# Altium PCB Lipo-Charger-PCB.PcbDoc
Units mm, origin at the board's own origin, x right, y up, seen from the top; angles counter-clockwise.
Board outline 55.88 x 55.88 mm, 2 copper layers (Top Layer, Bottom Layer); 21 components, 9 nets, 56 pads, 4 vias.
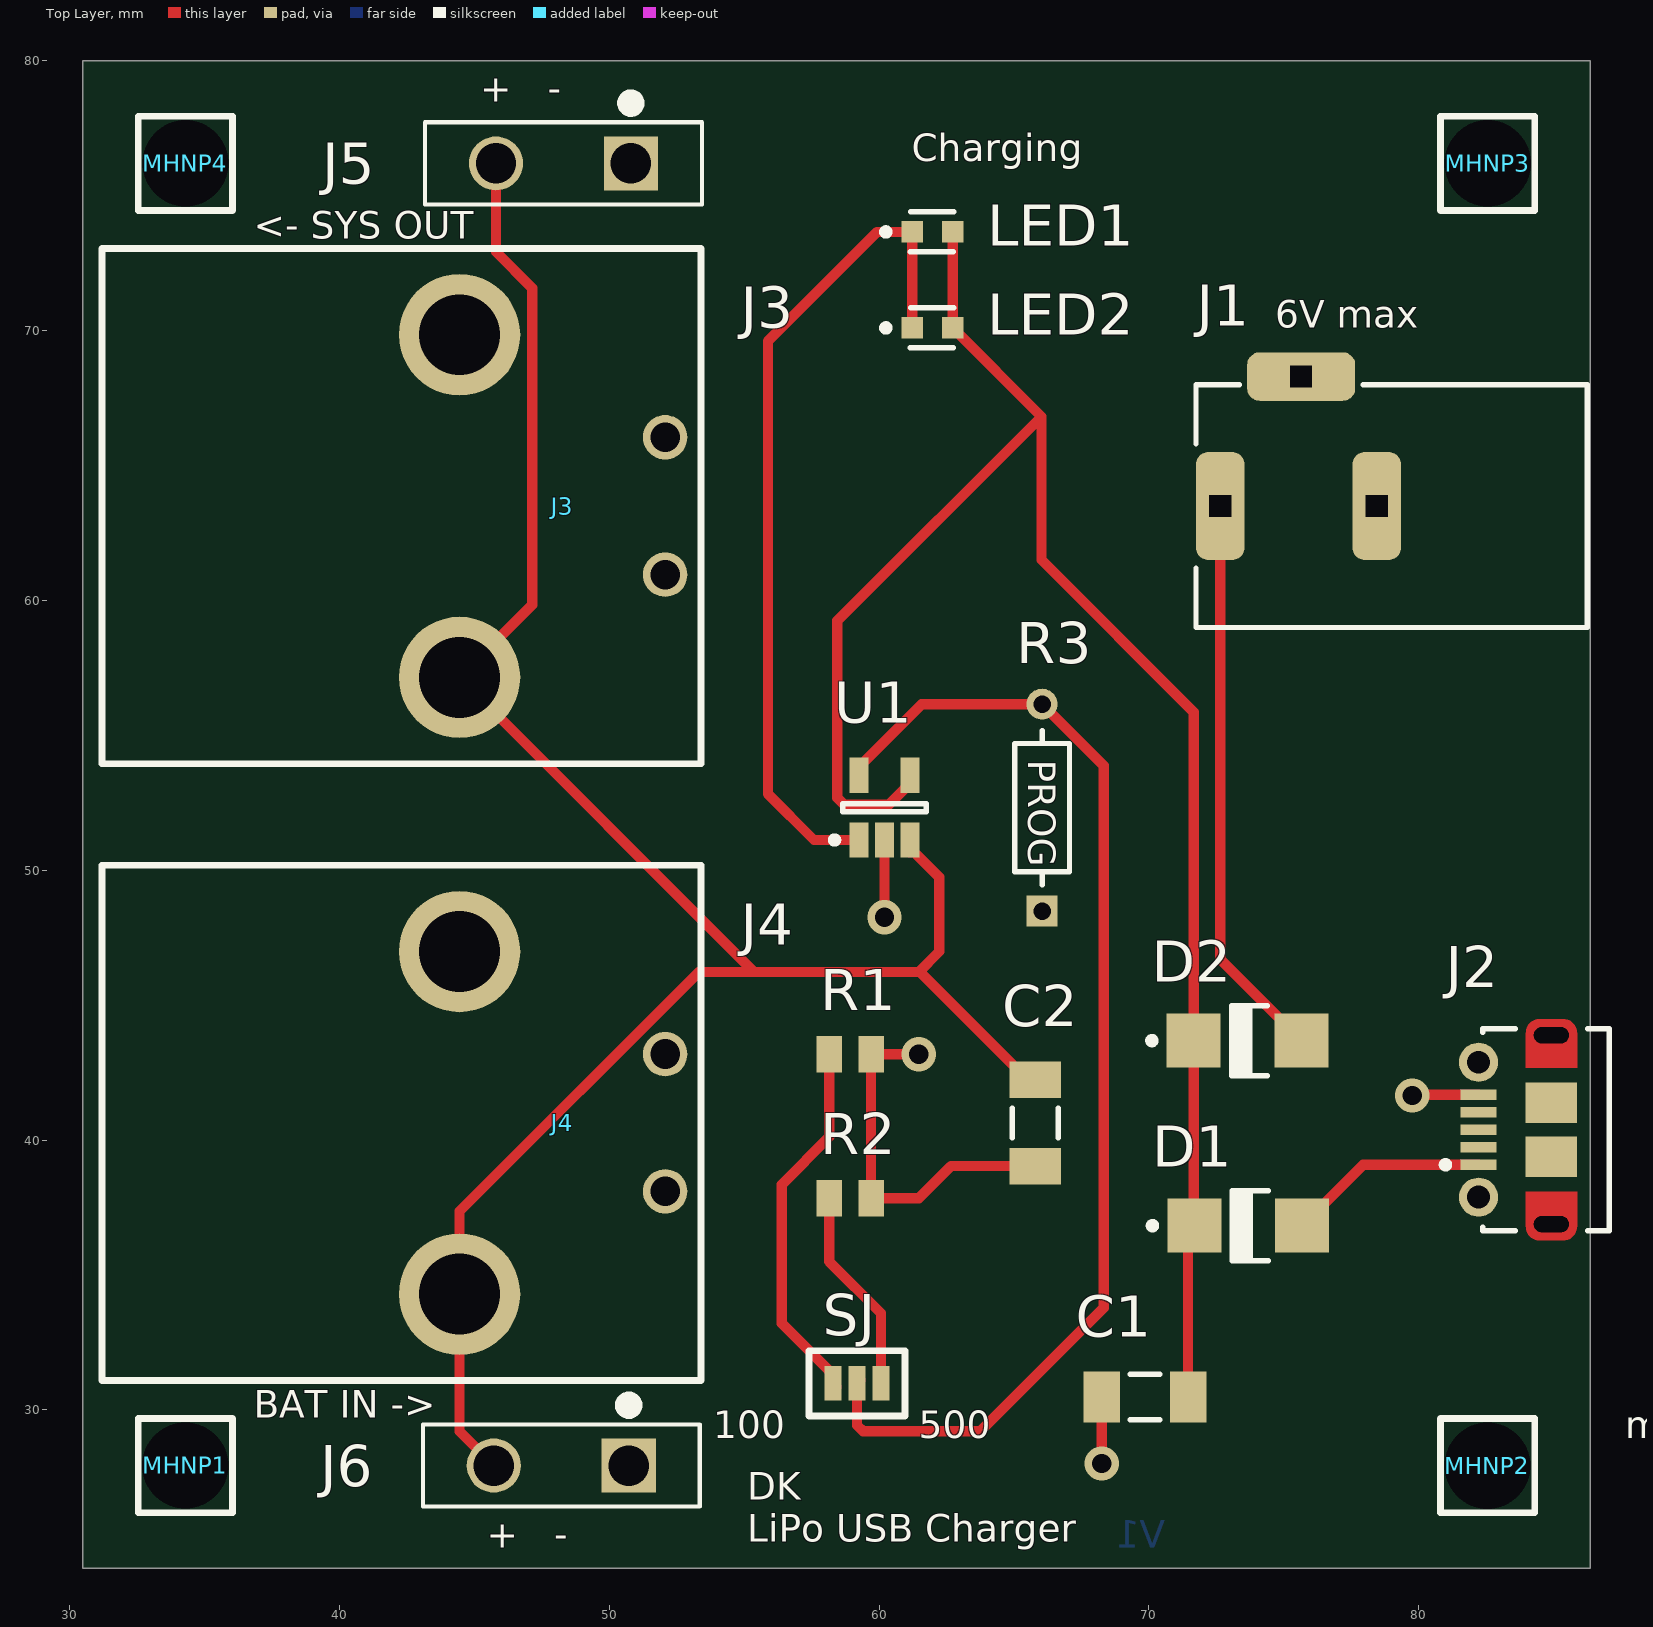
[diagram p0: Top Layer view]
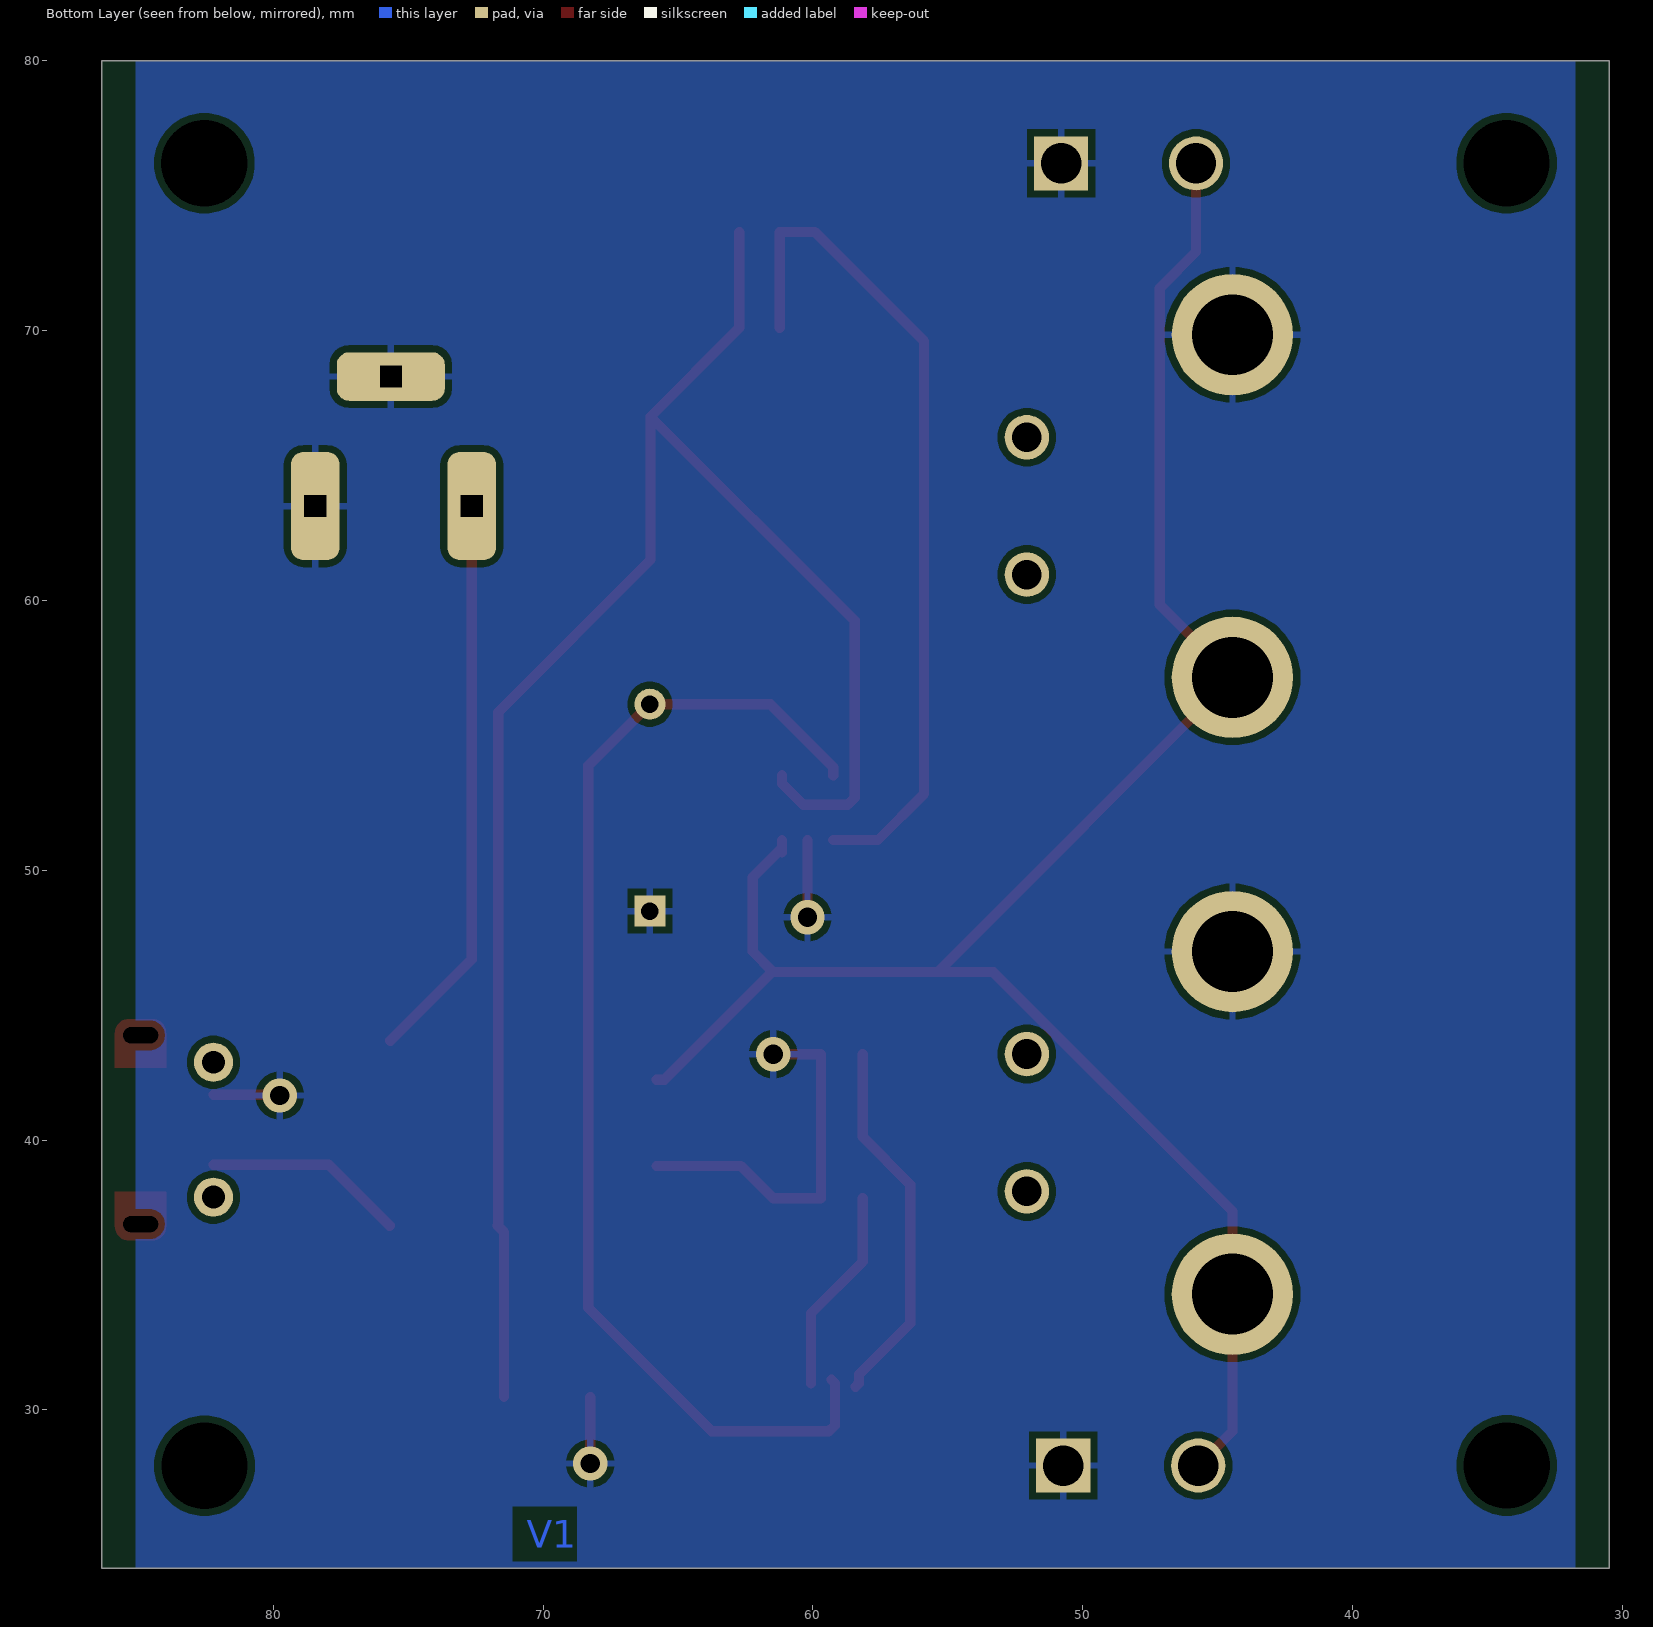
[diagram p1: Bottom Layer view, seen from below]
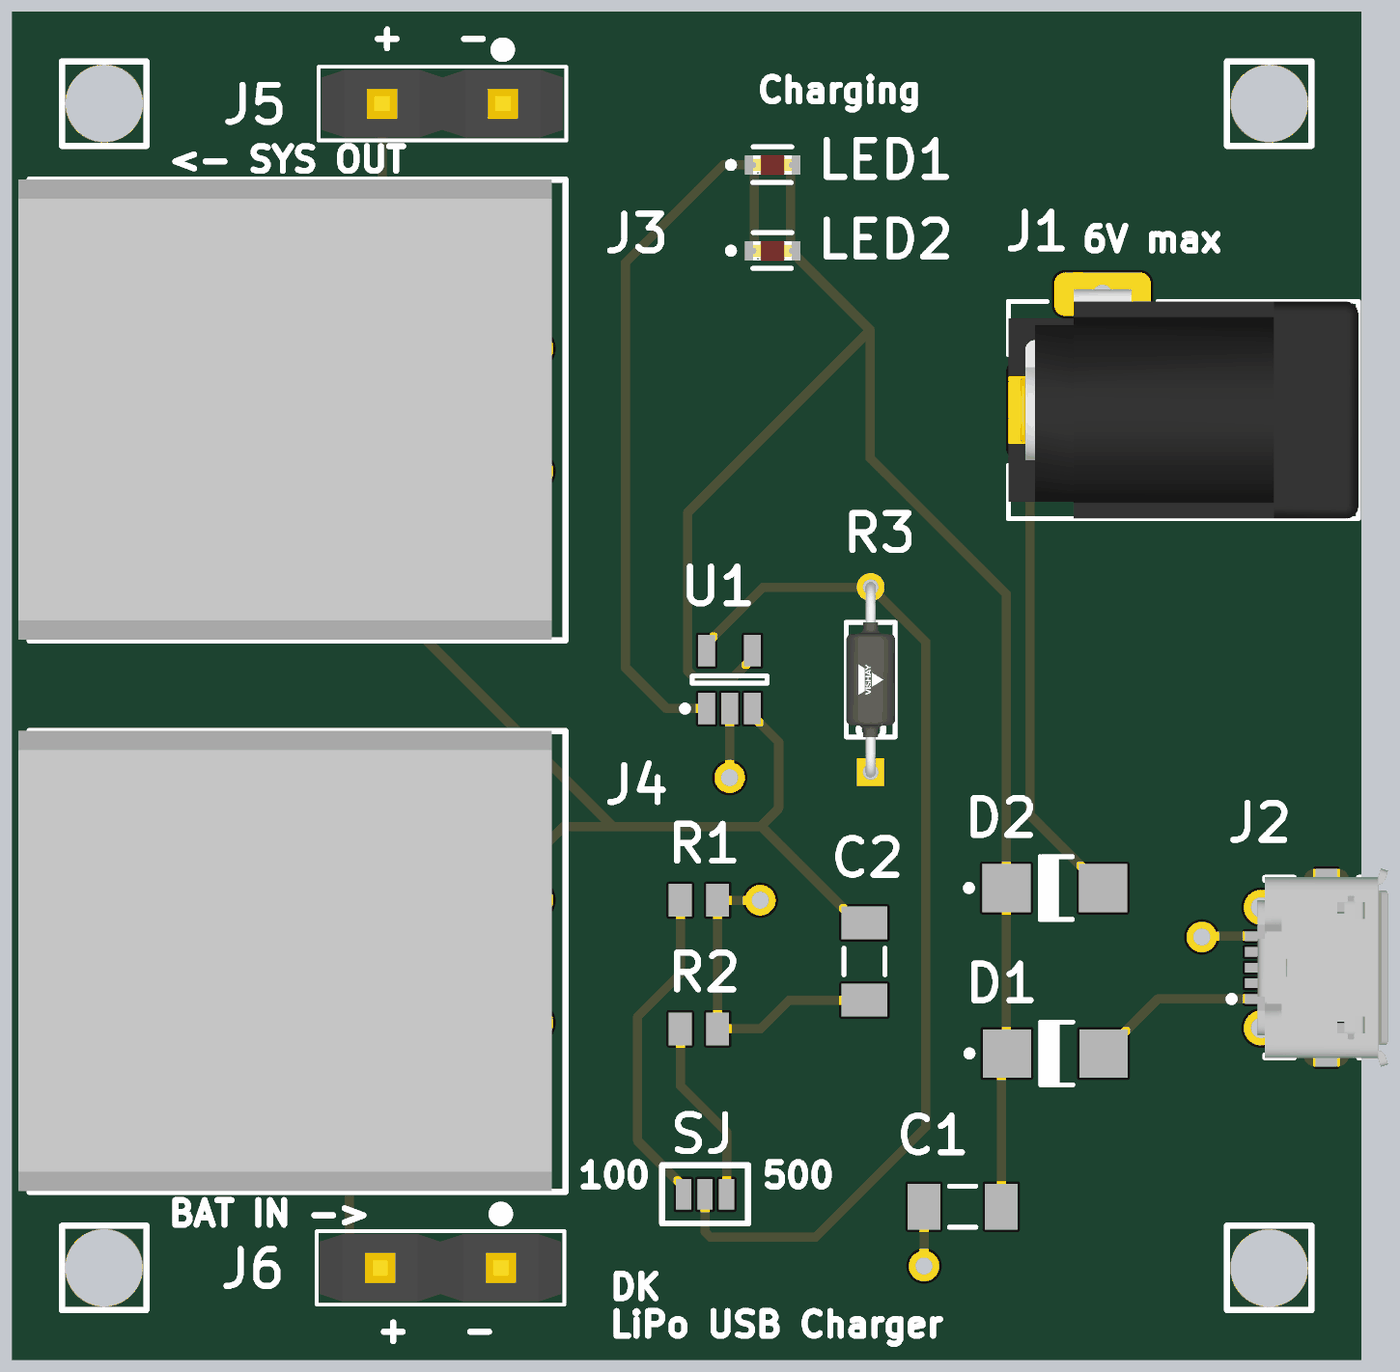
[diagram p2: 3D render of the assembled board from above, using the file's embedded part models]

## Layer stack, top to bottom
Top Solder: solder mask 0.0102, Solder Resist, Dk 3.5
Top Layer: signal copper 0.0356
Dielectric 1: dielectric 0.32, FR-4, Dk 4.8
Bottom Layer: signal copper 0.0356
Bottom Solder: solder mask 0.0102, Solder Resist, Dk 3.5

## Board outline
30.48,24.13 30.48,80.01 86.36,80.01 86.36,24.13

## Design rules (kind name [scope] priority, off if disabled: settings)
Clearance [All] p1: gap=0.254 ignorepadtopadclearanceinfootprint=TRUE
PolygonConnect [All] p1: connectstyle=Relief reliefconductorwidth=0.254 reliefentries=4 polygonreliefangle="90 Angle" airgapwidth=0.254
RoutingVias [All] p1: holewidth=0.711 width=1.27 viastyle="Through Hole" minholewidth=0.711 minwidth=1.27 maxholewidth=0.711 maxwidth=1.27
SolderMaskExpansion [All] p1: expansion=0.102 istentingtop=FALSE
SupplyNets "Schematic Supply Nets" [InNet('GND')] p1: voltage=0.000
Width [All] p1: maxlimit=1.016 minlimit=0.254 preferedwidth=1.016 minimp=50.000000 maximp=50.000000 favimp=50.000000
30 further rules are at their usual default settings.

## Components (designator, comment, footprint, x,y, rotation, side; value= is the part's Value field where it differs from the comment)
C1 "4.7uF" CAPC1206(3216)150_M 69.85,30.48 r0 top
C2 "4.7uF" CAPC1206(3216)150_M 65.786,40.64 r90 top
D1 "40V, 1A" ONSC-SMA-2-403D-02_V 73.681,36.83 r0 top
D2 "40V, 1A" ONSC-SMA-2-403D-02_V 73.66,43.688 r0 top
J1 "694106301002" 694106301002 78.994,63.5 r90 top
J2 "Micro-USB B" USB-MICRO-B_V 83.566,40.386 r90 top locked
J3 "connector header" 2-179276-2 44.45,69.85 r270 top
J4 "connector header" 2-179276-2 44.45,46.99 r270 top
J5 "1933189" CONN02_1933189_PXC 50.8,76.2 r180 top
J6 "1933189" CONN02_1933189_PXC 50.72,27.94 r180 top
LED1 "RED" FP-SML-LX0603IW-TR-MFG 61.976,73.66 r0 top
LED2 "RED" FP-SML-LX0603IW-TR-MFG 61.976,70.104 r0 top
MHNP1 "Mounting Hole Non-Plated 3.2mm" MTHNP3P2 34.29,27.94 r180 top locked
MHNP2 "Mounting Hole Non-Plated 3.2mm" MTHNP3P2 82.55,27.94 r270 top locked
MHNP3 "Mounting Hole Non-Plated 3.2mm" MTHNP3P2 82.55,76.2 r90 top locked
MHNP4 "Mounting Hole Non-Plated 3.2mm" MTHNP3P2 34.29,76.2 r90 top locked
R1 "2K ohm" RESC2013X70X40LL20T20 58.928,43.18 r180 top
R2 "2K ohm" RESC2013X70X40LL20T20 58.928,37.846 r180 top
R3 "PROG" FP-CMF50-0 66.04,52.324 r90 top
SJ "SJUMPER" SJUMPER-Footprint-1 59.182,30.988 r0 top
U1 "Charge Management Controller" SOT-23-OT5_M 60.198,52.324 r90 top

## Footprints (in the part's own frame and the unit in brackets; to place one, negate y for a bottom-side part, rotate by r counter-clockwise, add the part's x,y. Pads: shape width x height; smd on the part's side, far side on the other; paste and mask are expansions set on the pad)
2-179276-2 [mm] "2_hole_x19mmy22mm"
  round 4.5 hole 3: 1(0,0) 2(12.7,0)
  round 1.65 hole 1.1: ""(3.8,7.62) ""(8.89,7.62)
  silkscreen extent -3.2,-13.25 15.9,8.95, body extent -3.22,-13.73 15.87,8.37, height 10.86
694106301002 [mm] "DC Power Jack Right Angled(6.4)"
  rrect50% 4x1.8 hole 0.8 square: 1(0,6.35) 2(0,0.55)
  rrect50% 1.8x4 hole 0.8 square: 3(4.8,3.35)
  silkscreen extent -4.5,-7.25 4.5,7.25, body extent -4.5,-7.25 5,7.25, height 10.75
CAPC1206(3216)150_M [mm] "Chip Capacitor, Body 3.2x1.6mm, Height 1.5mm, IPC Low Density"
  rect 1.35x1.9 smd: 1(-1.6,0) 2(1.6,0)
  silkscreen extent -0.55,-0.85 0.55,0.85, body extent -1.7,-0.9 1.7,0.9, height 1.5
CONN02_1933189_PXC [mil]
  rect 79x79 / inner round 60 / far side rect 79x79 hole 59 paste-99999 mask+0: 1(0,0)
  round 79 / inner round 60 / far side round 79 hole 59 paste-99999 mask+0: 2(196.85,0)
  silkscreen extent -104,-98 300,60, body extent -98,-55 295,55, height 374
FP-CMF50-0 [mm]
  rect 1.15x1.15 hole 0.65 paste-2539.97 mask+0: 1(-3.835,0)
  round 1.15 hole 0.65 paste-2539.97 mask+0: 2(3.835,0)
  silkscreen extent -2.86,-1.01 2.86,1.01, body extent -4.51,-1.11 4.51,1.11, height 0.25
FP-SML-LX0603IW-TR-MFG [mm]
  rect 0.8x0.8 smd paste+0 mask+0: 1(-0.75,0) 2(0.75,0)
  silkscreen extent -1.85,-0.73 0.8,0.75, body extent -1.25,-0.63 1.25,0.63, height 0.25
MTHNP3P2 [mm]
  round 1 hole 3.2: ""(0.009,-0.002)
  silkscreen extent -1.75,-1.75 1.75,1.75
ONSC-SMA-2-403D-02_V [mm] "Molded, 2-Leads, Body 4.57x2.92mm"
  rect 2x2 smd: 1(-2,0) 2(2,0)
  silkscreen extent -3.67,-1.3 0.74,1.3, body extent -2.16,-1.3 2.16,1.3, height 2.2
RESC2013X70X40LL20T20 [mm] "Chip Resistor, 2-Leads, Body 2.00x1.25mm, IPC High Density"
  rect 0.95x1.35 smd: 1(-0.775,0) 2(0.775,0)
  body extent -1.1,-0.72 1.1,0.72, height 0.7
SJUMPER-Footprint-1 [mil]
  rect 25x50 smd: 1(-35,0) 2(0,0) 3(35,0)
  silkscreen extent -70,-48 70,48
SOT-23-OT5_M [mm] "SOT23, 5-Leads, Body 2.9x1.7mm, Pitch 0.95mm, Lead Span 2.8mm, IPC Low Density"
  rect 1.3x0.7 smd: 1(-1.2,0.95) 2(-1.2,0) 3(-1.2,-0.95) 4(1.2,-0.95) 5(1.2,0.95)
  silkscreen extent -1.32,-1.55 0.15,1.97, body extent -0.9,-1.55 0.9,1.55, height 1.45
USB-MICRO-B_V [mm] "USB, MICRO B, Body 7.491x4.695 mm, Pitch 0.65 mm"
  rect 0.4x1.35 smd: 1(-1.3,1.35) 2(-0.65,1.35) 3(0,1.35) 4(0.65,1.35) 5(1.3,1.35)
  round 1.45 hole 0.85: 6(-2.5,1.35) 7(2.5,1.35)
  rrect50% 0x0 hole 0.6 slot 1.3 at 90 deg: 8(-3.5,-1.35) 11(3.5,-1.35)
  rect 1.5x1.9 smd: 9(-1,-1.35) 10(1,-1.35)
  Top Layer circle w0.5: c-3.6,-1.8 r0.25
  Top Layer circle w0.5: c-3.6,-0.9 r0.25
  Top Layer circle w0.5: c3.6,-1.8 r0.25
  Top Layer circle w0.5: c3.6,-0.9 r0.25
  Top Layer region: -3.6,-1.8 -3.6,-0.9 -4.1,-0.9 -4.1,-1.8
  Top Layer region: 3.6,-0.9 3.6,-1.8 4.1,-1.8 4.1,-0.9
  Top Layer region: 2.3,-0.4 2.3,-2.3 3.6,-2.3 3.6,-0.4
  Top Layer region: -2.3,-2.3 -2.3,-0.4 -3.6,-0.4 -3.6,-2.3
  silkscreen extent -3.75,-3.5 3.75,2.7, body extent -4.1,-3.9 4.1,1.5, height 2.67

## Part data
C1 C2: library part CMP-1037-04894-1, Case-EIA=1206, Case-Metric=3216, Rated Voltage="6.3 V", Tolerance=Â±5%, Max Thickness="1.45 mm", Technology=SMT
D1 D2: library part CMP-1055-00320-1, "Schottky Power Rectifier, 2-Pin SMA, Pb-Free, Tape and Reel", Manufacturer="On Semiconductor", PartNumber=MBRA140T3G, ComponentLink1Description="Manufacturer URL", ComponentLink1URL=http://www.onsemi.com/, ComponentLink2Description=Datasheet, ComponentLink2URL=http://www.onsemi.cn/pub_link/Collateral/MBRA140T3-D.PDF, ComponentLink3Description="Package Specification", ComponentLink3URL=http://www.onsemi.com/pub_link/Collateral/403D-02.PDF, Configuration=Single, DatasheetVersion="Rev. 10", IFSM Max (A)=30, Mounting Technology="Surface Mount", PackageDescription="2-Pin Small Molded Package, J-Bend Lead, Body 2.605 x 4.315 mm", PackageReference=SMA-2-403D-02, PackageVersion="Rev. G, 07/2012", Packing="Tape and Reel", RoHS=TRUE
J1: library part CMP-1502-00188-2, Color=Black, Current Rating=5A, Flammability Rating="UL94 V-0", Insulation Resistance=100MΩ, Max Operating Temperature=85°C, Min Operating Temperature=-40°C, Operating Supply Voltage=24V, Voltage Rating (DC)=20V, Connector Type=Power, Contact Gender=Female, Contact Material="Gold, Tin", Contact Plating=Tin, Gender=Male, Height=11mm, Housing Material=Polyamide, Mount="Through Hole", NexarPartId=52676100, Number of Contacts=3, Packaging=Bulk, REACH SVHC=Unknown, RoHS=Compliant, Shielding=Unshielded, Termination="Through Hole", Voltage Rating=24V
J2: library part CMP-2000-05827-1, Manufacturer=Molex, Package Description="5-Leads USB, Micro B, Body 7.5 x 5 mm, Pitch 0.65 mm", Package Reference=MICRO-B, Package Version="Rev. F, 12/2012", Standard Package=1, Voltage - Max=30V, 3D Model=105017-0001.stp, Catalog Drawings=1050170001, Category=Connectors,Interconnects, Circuits=5, Connector Type=USB-microB, Datasheet URL=http://www.molex.com/elqNow/elqRedir.htm?ref=http://www.molex.com/webdocs/datasheets/pdf/en-us/1050170001_IO_CONNECTORS.pdf, Datasheet Version=03/2016, Family=USB,DVI,HDMIConnectors, Featured Product=Micro-USBConnectorsUSBConnectors, Features=Shielded,SolderRetention, Gender=Receptacle, Ingress Protection=-, Manufacturer URL=http://www.molex.com/, Mating Products=WM17145-ND-CABLEMICROUSBBTOSTDA1.0MWM17147-ND-CABLEMICROUSBBTOSTDA2.0MWM17146-ND-CABLEMICROUSBBTOSTDA1.5M, Mounting Technology=SurfaceMount, Mounting Type=BoardCutout,SurfaceMount,RightAngle, Number of Contacts=5, Online Catalog=Molex-MicroUSB, Other Names=WM1399DKR, Package URL=http://www.molex.com/pdm_docs/sd/1050170001_sd.pdf, Packaging=Digi-Reel®, PCN Assembly/Origin=ResinSupplier21/Oct/2015, RoHS Information=1050170001CertofCompliance, Series=-, Specifications=-
J3 J4: library part 2-179276-2, Manufacture=TE, Supplier Part Number 1=A29548-ND, Manufacture part number=2-179276-2, Supplier 1=Digikey
J5 J6: "No Description Available", Mfr_Name="Phoenix Contact", ComponentLink1Description="New link", ComponentLink1URL=https://www.digikey.de/en/products/detail/phoenix-contact/1933189/568682, RefDes=RefDes, Type=Type
LED1 LED2: library part CMP-57192-000012-1, "LED RED DIFFUSED SMD", Case Code (Imperial)=0603, Case Code (Metric)=1608, Color=Red, Forward Current=20mA, Forward Voltage=2V, Lens Color=White, Max Operating Temperature=85°C, Min Operating Temperature=-25°C, Package Quantity=1, Power Dissipation=50mW, Approvals=UL, Case/Package=0603, Diameter=0.061inch, Dominant Wavelength=635nm, Height=0.6mm, Illumination Color=Red, Lead Free="Lead Free", Length=1.6mm, Lens Style=Diffused, Lens Transparency=Diffused, Luminous Intensity=14mcd, Mount="Surface Mount", Number of LEDs=1, Number of Pins=2, Packaging="Tape and Reel", RoHS Compliant=Yes, Test Current=20mA, Viewing Angle=160°, Wavelength=635nm, Width=0.8mm
MHNP1 MHNP2 MHNP3 MHNP4: library part MTHNP3P2
R1 R2: library part CMP-2001-00483-1, Manufacturer=Panasonic, Part Number=ERJ-P06J202V
R3: library part CMP-00030-44386654-1, Case/Package=Axial, Max Operating Temperature=175°C, Max Power Dissipation=250mW, Min Operating Temperature=-55°C, Power Rating=125mW, Resistance=73.2kΩ, Temperature Coefficient=50ppm/°C, Tolerance=1%, Voltage Rating=200V, Composition="Metal Film", Diameter=1.65mm, Features="Flame Retardant Coating, Moisture Resistant", Lead Free="Lead Free", Length=3.81mm, Mount="Through Hole", NexarPartId=44386654, Number of Terminations=2, Packaging="Cut Tape", RoHS=Compliant, Schedule B="8533210090, 8533210090", Termination=Axial, Voltage Rating (DC)=200V, Width=1.65mm
SJ: library part CMP-00000-1, "solder jumper 3 pods and pins", Pins=3
U1: library part CMP-0133-00139-1, Code_IPC=SOT23-5, DatasheetVersion="revB, Sep-2007", PackageDescription="5-Lead Plastic Small Outline Transistor (OT) [SOT-23]", PackageReference=SOT-23-OT5, PackageVersion="revBB, Aug-2009"

## Via types
v1: diameter 1.27, hole 0.711, Top Layer to Bottom Layer, 4 vias

## Nets (pads, with @x,y where several pads share a name; then routed paths per layer and width w, separated by ;. In a path a pad name is that pad's centre, name@x,y a point inside that pad or via, vN(x,y) a via of type N, cw(c..) or ccw(c..) an arc to the next point about the centre after c; other vN are vias at no path point)
GND: C1.1 C2.1 J1.2 J1.3 J2.5 J3.1 J4.1 J5.1 J6.1 R1.1 R2.1 R3.1 U1.2 | length 21.6
  Top Layer w0.381: v1(60.198,48.26) U1.2 ; v1(61.468,43.18) R1.1 R2.1 61.468,37.846 62.662,39.04 C2.1 ; C1.1 v1(68.25,28.016) v1@68.326,27.94 ; v1(79.756,41.656) 79.786,41.686 J2.5
NetC1_2: C1.2 D1.1 D2.1 LED1.2 LED2.2 U1.4 | length 67.7
  Top Layer w0.381: U1.4 61.148,53.224 60.353,52.429 58.714,52.429 58.453,52.69 58.453,59.249 66.017,66.813 ; LED1.2 LED2.2 66.017,66.813 ; 65.991,66.839 66.017,66.813 ; C1.2 71.45,36.599 D1.1 71.66,36.851 D2.1 71.66,55.865 66.017,61.507 66.017,66.813
NetC2_2: C2.2 J3.2 J4.2 J5.2 J6.2 U1.3 | length 78.9
  Top Layer w0.381: J6.2 44.45,29.21 J4.2 44.45,37.365 53.313,46.228 55.372,46.228 ; J5.2 45.8,72.919 47.145,71.575 47.145,59.845 J3.2 55.372,46.228 ; U1.3@61.148,50.669 U1.3 61.148,50.824 62.23,49.742 62.23,46.99 61.468,46.228 ; C2.2 65.511,42.24 61.523,46.228 61.468,46.228 ; 55.372,46.228 61.468,46.228
NetD1_2: D1.2 J2.1 | length 7.5
  Top Layer w0.381: D1.2 77.937,39.086 J2.1
NetD2_2: D2.2 J1.1 | length 21.1
  Top Layer w0.381: J1.1 72.644,46.704 D2.2
NetLED1_1: LED1.1 LED2.1 U1.1 | length 31.4
  Top Layer w0.381: U1.1 57.588,51.124 55.88,52.832 55.88,69.608 59.932,73.66 LED1.1 LED2.1
NetR1_2: R1.2 SJ.1 | length 13.9
  Top Layer w0.381: R1.2 58.153,40.119 56.388,38.354 56.388,33.21 58.293,31.305 SJ.1 SJ.1@58.42,30.861
NetR2_2: R2.2 SJ.3 | length 7.7
  Top Layer w0.381: R2.2 58.153,35.498 60.071,33.58 SJ.3
NetR3_2: R3.2 SJ.2 U1.5 | length 44.2
  Top Layer w0.381: U1.5 59.248,53.824 61.583,56.159 R3.2 68.326,53.873 68.326,33.782 63.754,29.21 59.405,29.21 59.182,29.433 SJ.2 SJ.2@59.309,31.115
pads on no net: J2.2 J2.3 J2.4 J2.6 J2.7 J2.8 J2.9 J2.10 J2.11 J3. J4. MHNP1. MHNP2. MHNP3. MHNP4.

## Polygon pours and split planes (outlines as drawn)
GND on Bottom Layer "GND_L02_P000" (solid, pour order 0): 31.75,80.01 85.09,80.01 85.09,24.13 31.75,24.13

## Other copper
Bottom Layer:
  text "V1" at 70.612,24.892 h1.02

## Silkscreen, mask and mechanical layers (free items; w line width, h text height)
Top Overlay:
  text "+   -" at 45.212,78.486 h1.02
  text "Charging" at 61.214,76.285 h1.02
  text "<- SYS OUT" at 36.83,73.406 h1.02
  text "6V max" at 74.676,70.104 h1.02
  text "PROG" at 65.532,54.102 h1.02 r270
  text "BAT IN ->" at 36.83,29.718 h1.02
  text "100                                                                      mA" at 53.848,28.956 h1.02
  text "500                                                                      mA" at 61.468,28.956 h1.02
  text "DK" at 55.118,26.67 h1.02
  text "LiPo USB Charger" at 55.105,25.118 h1.02
  text "+   -" at 45.466,24.892 h1.02

## Text inside footprints (layer, text, board x,y; h text height)
J2: Mechanical 1 "PCB EDGE" at 86.466,33.186 h0.3 r90